# EAGLE board MicroMod_Processor_STM32WB5MMG-Panel (EAGLE 9.6.2), part 1 of 7
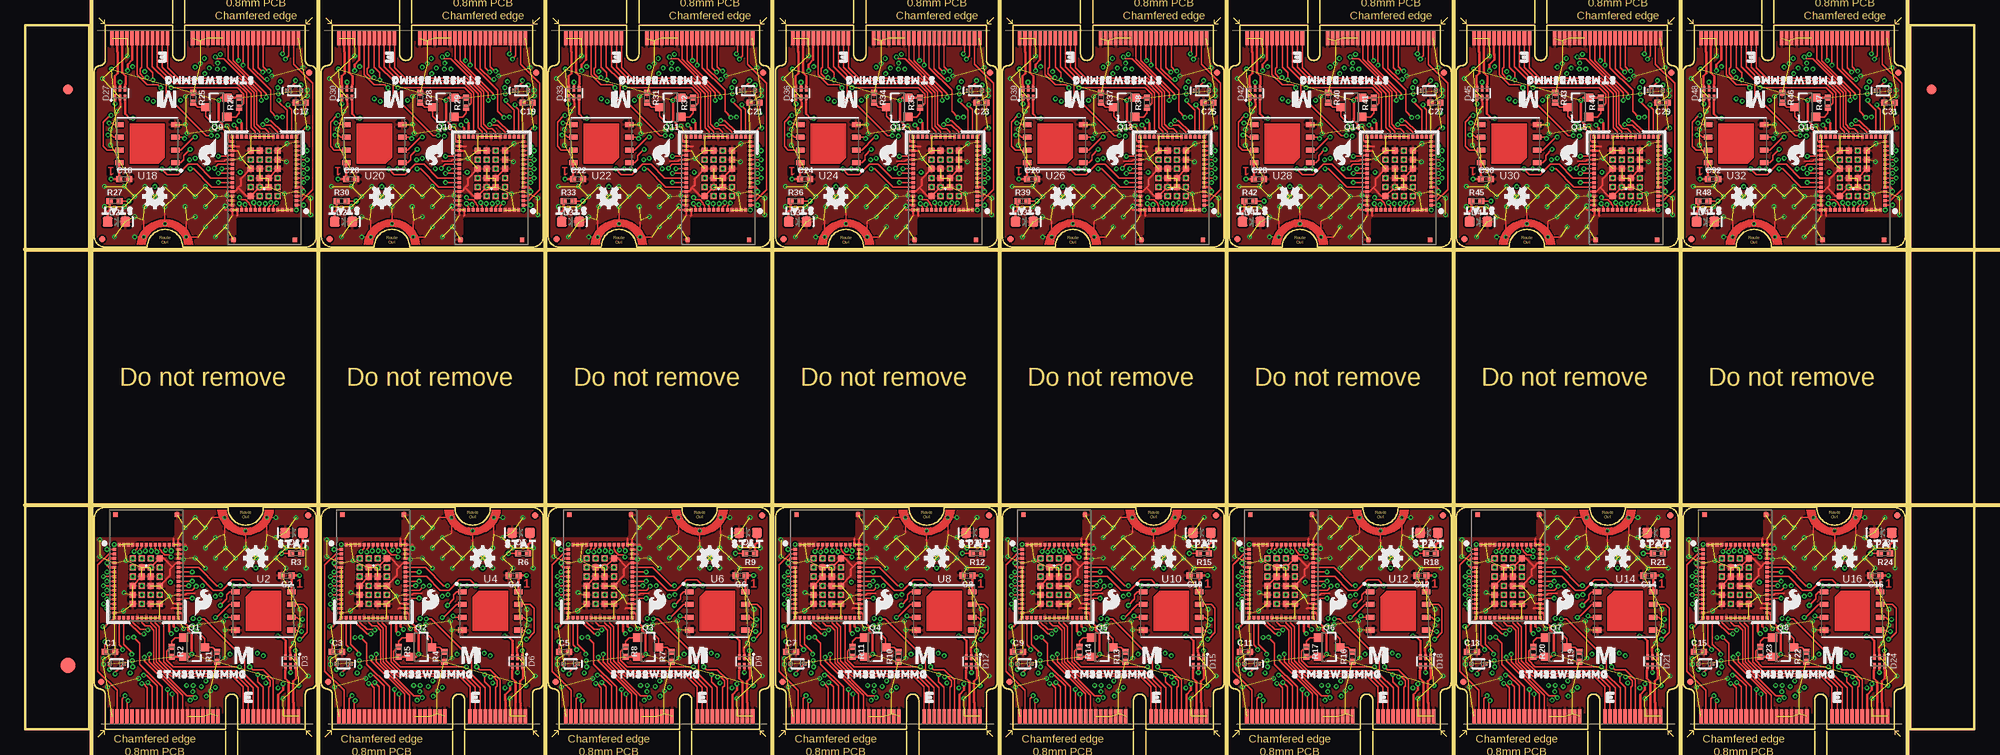
[diagram p0: board, top side]
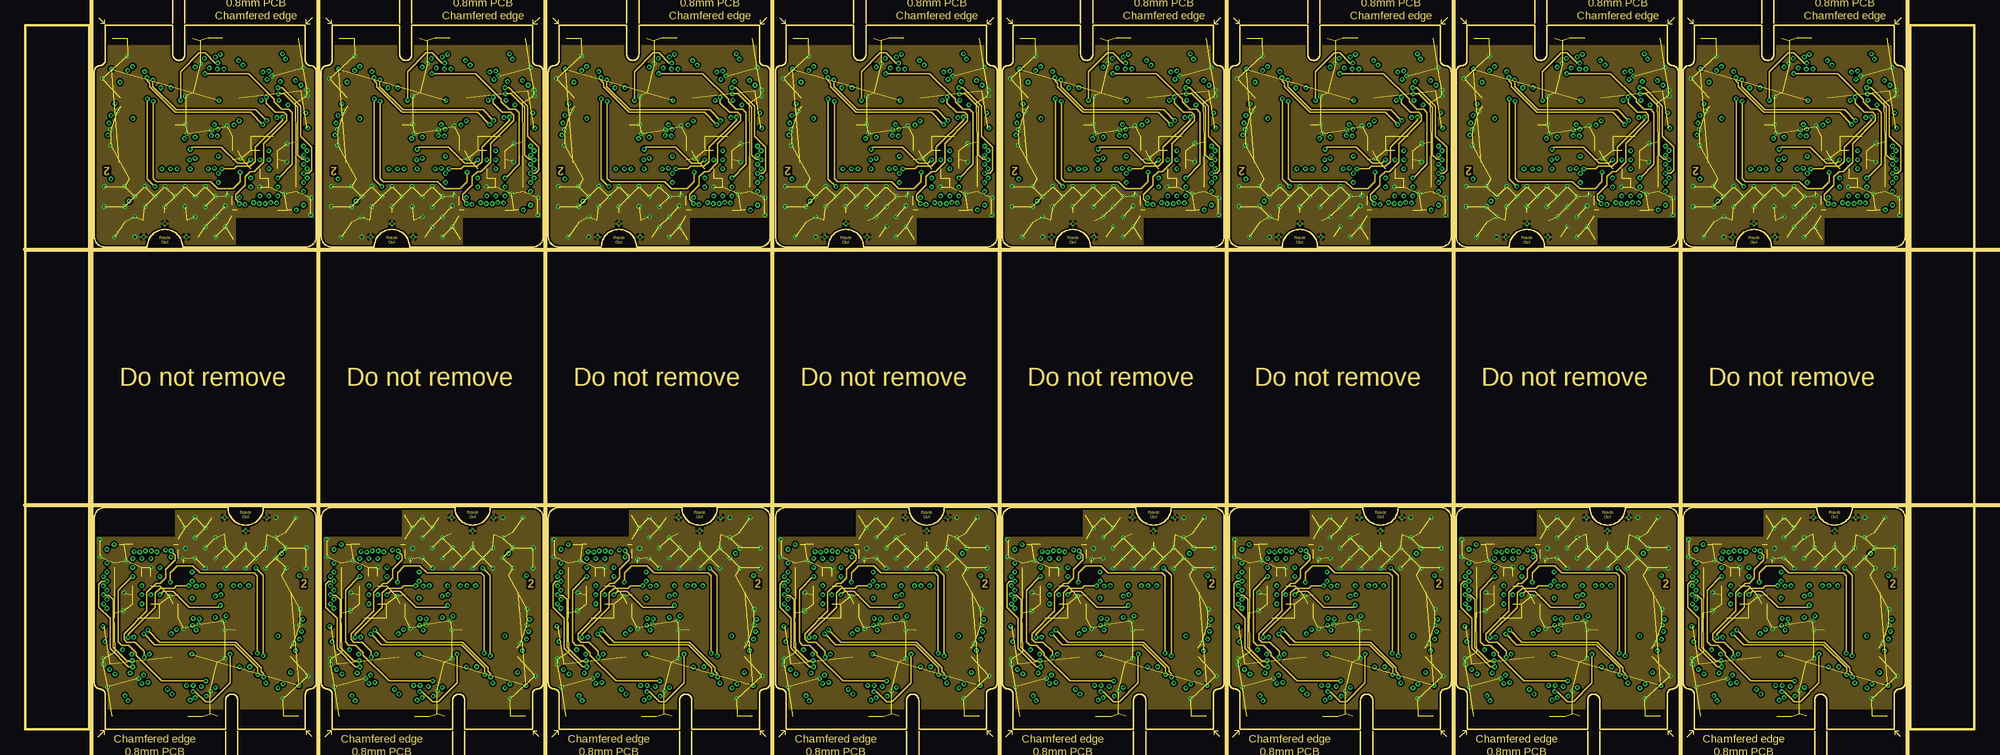
[diagram p1: board, inner layer Route2]
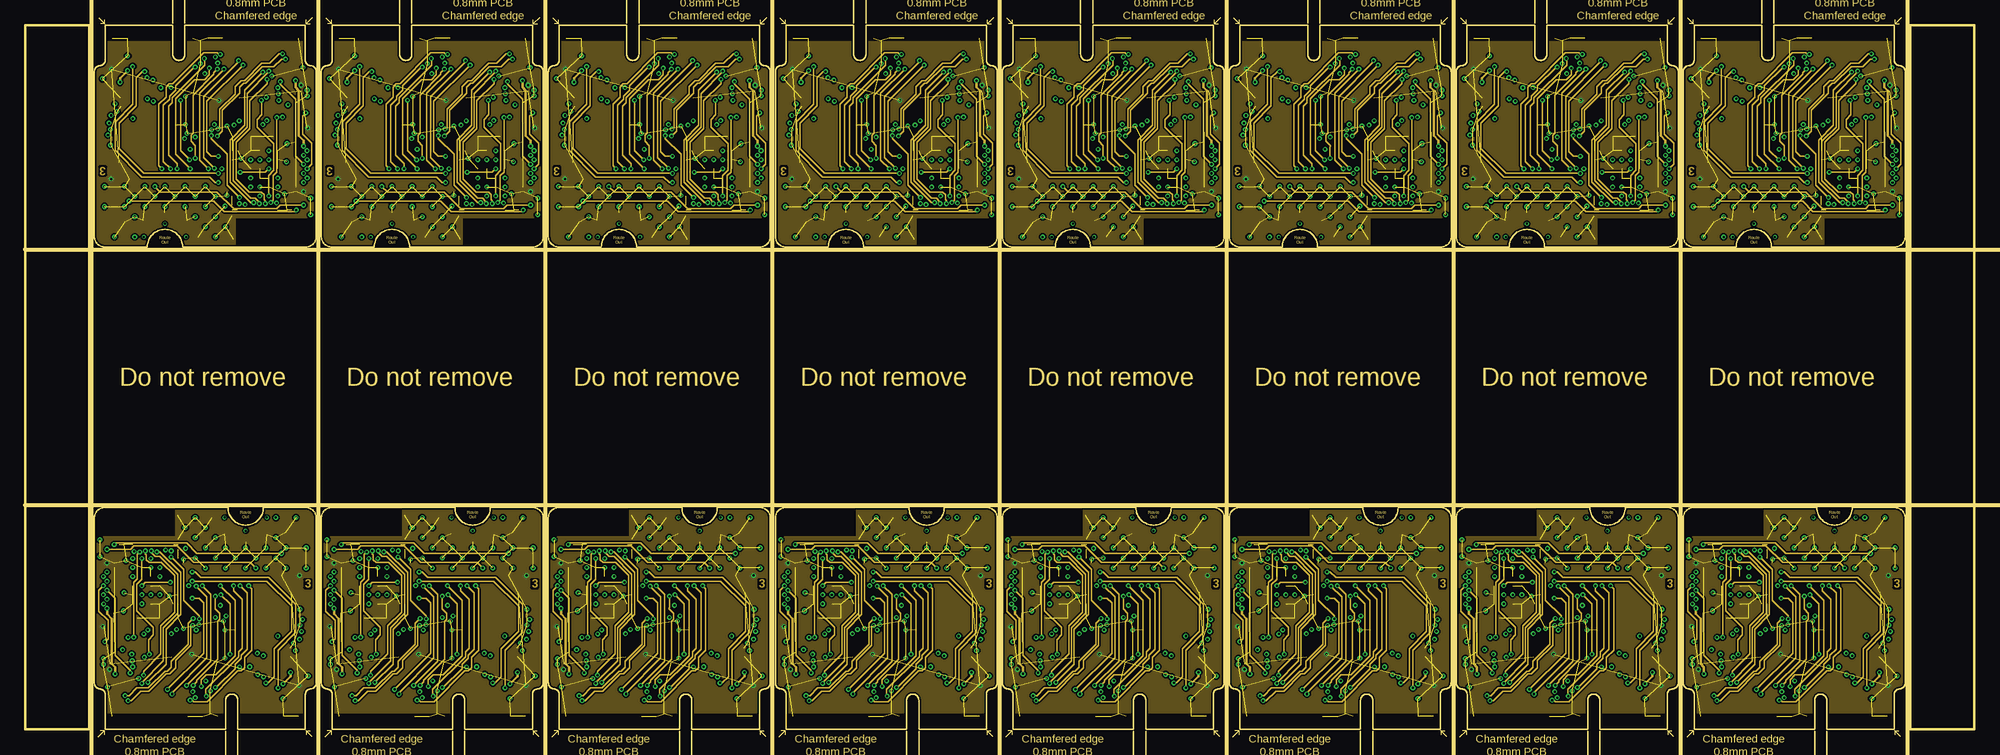
[diagram p2: board, inner layer Route15]
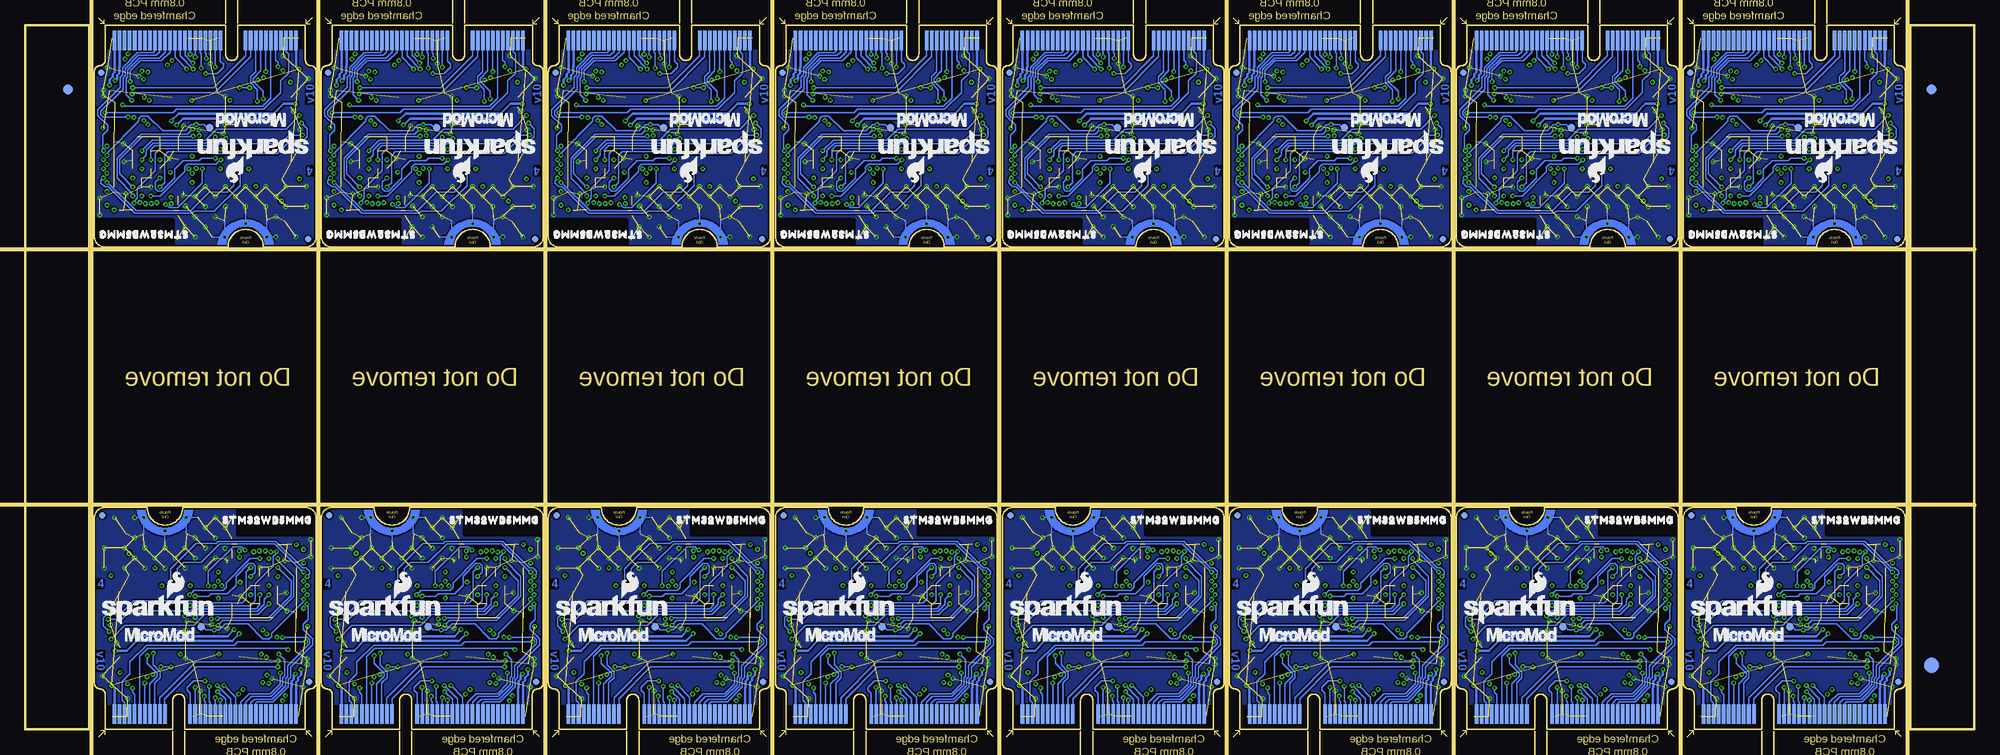
[diagram p3: board, bottom side, seen from below]

Size 193.27 x 69.85 mm. Coordinates in mm from the lower left corner, seen from the top.
Outline: 312 segments
Copper layers (1+2*15+16): Top 0.035mm / dielectric 0.2mm / Route2 0.0175mm / dielectric 0.265mm / Route15 0.0175mm / dielectric 0.2mm / Bottom 0.035mm
Design rules "MicroMod_Processor_STM32WB5MMG": minimum track width 4mil, minimum drill 0.2mm, track to track 4mil, track to pad 4mil, pad to pad 4mil, via to via 4mil, smd to smd 4mil, copper to edge 6mil, drill to drill 6mil, minimum pad ring 3mil, minimum via ring 5mil, stop-mask expansion 2.5mil, vias tented up to drill 25mil, thermal gap 10mil
Net classes: 1 USB_Diff: width 0.25 mm, clearance 0.2 mm to class 0, clearance 0.2 mm; 2 Power: width 0.25 mm
tRestrict: area 15.1,12.2 to 15.3,12.2; area 15.1,17.6 to 15.3,17.6; area 15.1,17.1 to 15.3,17.2; area 15.1,16.7 to 15.3,16.8; area 37.6,12.2 to 37.8,12.2; area 37.6,17.6 to 37.8,17.6; area 37.6,17.1 to 37.8,17.2; area 37.6,16.7 to 37.8,16.8; area 60.1,12.2 to 60.3,12.2; area 60.1,17.6 to 60.3,17.6; area 60.1,17.1 to 60.3,17.2; area 60.1,16.7 to 60.3,16.8; 52 more areas
Milling: 11 lines

## Footprints (pad centres in the part's own frame; a part is rotated, then mirrored left to right if it is on the bottom)
0402-TIGHT = smd 0.6 x 0.6: 1 -0.5,0; 2 0.5,0
SOD-523 = smd 0.4 x 0.4: A -0.7,0; C 0.7,0
LED-0603 = smd 1 x 1: A -0.877,0; C 0.877,0
SOT886 = smd 0.61 x 0.25: 1 -0.405,0.5 | smd 0.56 x 0.25: 2 -0.43,0; 3 -0.43,-0.5; 4 0.43,-0.5; 5 0.43,0; 6 0.43,0.5
FIDUCIAL-1X2 = smd 1 x 1: 1 0,0
FIDUCIAL-1.5X3 = smd 1.5 x 1.5: 1 0,0
FIDUCIAL-MICRO = smd 0.635 x 0.635: 1 0,0
M.2-CARD-E-22 = smd 0.35 x 1.45: 1 9.25,1.275; 3 8.75,1.275; 5 8.25,1.275; 7 7.75,1.275; 9 7.25,1.275; 11 6.75,1.275; 13 6.25,1.275; 15 5.75,1.275; 17 5.25,1.275; 19 4.75,1.275; 21 4.25,1.275; 23 3.75,1.275; 33 1.25,1.275; 35 0.75,1.275; 37 0.25,1.275; 39 -0.25,1.275; 41 -0.75,1.275; 43 -1.25,1.275; 45 -1.75,1.275; 47 -2.25,1.275; 49 -2.75,1.275; 51 -3.25,1.275; 53 -3.75,1.275; 55 -4.25,1.275; 57 -4.75,1.275; 59 -5.25,1.275; 61 -5.75,1.275; 63 -6.25,1.275; 65 -6.75,1.275; 67 -7.25,1.275; 69 -7.75,1.275; 71 -8.25,1.275; 73 -8.75,1.275; 75 -9.25,1.275 | smd 0.35 x 1.95 bottom: 2 9,1.525; 4 8.5,1.525; 6 8,1.525; 8 7.5,1.525; 10 7,1.525; 12 6.5,1.525; 14 6,1.525; 16 5.5,1.525; 18 5,1.525; 20 4.5,1.525; 22 4,1.525; 32 1.5,1.525; 34 1,1.525; 36 0.5,1.525; 38 0,1.525; 40 -0.5,1.525; 42 -1,1.525; 44 -1.5,1.525; 46 -2,1.525; 48 -2.5,1.525; 50 -3,1.525; 52 -3.5,1.525; 54 -4,1.525; 56 -4.5,1.525; 58 -5,1.525; 60 -5.5,1.525; 62 -6,1.525; 64 -6.5,1.525; 66 -7,1.525; 68 -7.5,1.525; 70 -8,1.525; 72 -8.5,1.525; 74 -9,1.525 | drill 0.2: GND1 1.9,21; GND2 4,19.7; GND3 6.1,21
SOT23-3 = smd 0.8 x 0.9: 1 -0.95,-1; 2 0.95,-1; 3 0,1.1
PAD.03X.03 = smd 0.762 x 0.762: 1 0,0
SIP-LGA86 = smd 0.35 x 0.35: 1 -3.175,2.075; 17 -3.175,-5.175; 31 3.175,-5.175; 47 3.175,2.075 | smd 0.35 x 0.3: 2 -3.175,1.6; 3 -3.175,1.15; 4 -3.175,0.7; 5 -3.175,0.25; 6 -3.175,-0.2; 7 -3.175,-0.65; 8 -3.175,-1.1; 9 -3.175,-1.55; 10 -3.175,-2; 11 -3.175,-2.45; 12 -3.175,-2.9; 13 -3.175,-3.35; 14 -3.175,-3.8; 15 -3.175,-4.25; 16 -3.175,-4.7; 32 3.175,-4.7; 33 3.175,-4.25; 34 3.175,-3.8; 35 3.175,-3.35; 36 3.175,-2.9; 37 3.175,-2.45; 38 3.175,-2; 39 3.175,-1.55; 40 3.175,-1.1; 41 3.175,-0.65; 42 3.175,-0.2; 43 3.175,0.25; 44 3.175,0.7; 45 3.175,1.15; 46 3.175,1.6 | smd 0.3 x 0.35: 18 -2.7,-5.175; 19 -2.25,-5.175; 20 -1.8,-5.175; 21 -1.35,-5.175; 22 -0.9,-5.175; 23 -0.45,-5.175; 24 0,-5.175; 25 0.45,-5.175; 26 0.9,-5.175; 27 1.35,-5.175; 28 1.8,-5.175; 29 2.25,-5.175; 30 2.7,-5.175; 48 2.7,2.075; 49 2.25,2.075; 50 1.8,2.075; 51 1.35,2.075; 52 0.9,2.075; 53 0.45,2.075; 54 0,2.075; 55 -0.45,2.075; 56 -0.9,2.075; 57 -1.35,2.075; 58 -1.8,2.075; 59 -2.25,2.075; 60 -2.7,2.075 | smd 0.6 x 0.6: 61 -1.35,0.7; 62 -1.35,-0.2; 63 -1.35,-1.1; 64 -1.35,-2; 65 -1.35,-2.9; 66 -1.35,-3.8; 67 -0.45,-3.8; 68 0.45,-3.8; 69 1.35,-3.8; 70 1.35,-2.9; 71 1.35,-2; 72 1.35,-1.1; 73 1.35,-0.2; 74 1.35,0.7; 75 0.45,0.7; 76 -0.45,0.7; 77 -0.45,-0.2; 78 -0.45,-1.1; 79 -0.45,-2; 80 -0.45,-2.9; 81 0.45,-2.9; 82 0.45,-2; 83 0.45,-1.1; 84 0.45,-0.2 | smd 0.43 x 0.43: 85 -3.05,5.035; 86 3.05,5.035
WSON-8-6X5 = smd 0.85 x 0.5: 1 -2.775,1.905; 2 -2.775,0.635; 3 -2.775,-0.635; 4 -2.775,-1.905; 5 2.775,-1.905; 6 2.775,-0.635; 7 2.775,0.635; 8 2.775,1.905

## Placement (x,y rotation side)
C1  0.1uF  [0402-TIGHT]  8.41,7.7 0 top
C2  0.1uF  [0402-TIGHT]  25.91,15.25 180 top
C3  0.1uF  [0402-TIGHT]  30.91,7.7 0 top
C4  0.1uF  [0402-TIGHT]  48.41,15.25 180 top
C5  0.1uF  [0402-TIGHT]  53.42,7.7 0 top
C6  0.1uF  [0402-TIGHT]  70.92,15.25 180 top
C7  0.1uF  [0402-TIGHT]  75.93,7.7 0 top
C8  0.1uF  [0402-TIGHT]  93.43,15.25 180 top
C9  0.1uF  [0402-TIGHT]  98.44,7.7 0 top
C10  0.1uF  [0402-TIGHT]  115.94,15.25 180 top
C11  0.1uF  [0402-TIGHT]  120.95,7.7 0 top
C12  0.1uF  [0402-TIGHT]  138.45,15.25 180 top
C13  0.1uF  [0402-TIGHT]  143.46,7.7 0 top
C14  0.1uF  [0402-TIGHT]  160.96,15.25 180 top
C15  0.1uF  [0402-TIGHT]  165.96,7.7 0 top
C16  0.1uF  [0402-TIGHT]  183.46,15.25 180 top
C17  0.1uF  [0402-TIGHT]  27.31,62.15 180 top
C18  0.1uF  [0402-TIGHT]  9.81,54.6 0 top
C19  0.1uF  [0402-TIGHT]  49.82,62.15 180 top
C20  0.1uF  [0402-TIGHT]  32.32,54.6 0 top
C21  0.1uF  [0402-TIGHT]  72.32,62.15 180 top
C22  0.1uF  [0402-TIGHT]  54.82,54.6 0 top
C23  0.1uF  [0402-TIGHT]  94.83,62.15 180 top
C24  0.1uF  [0402-TIGHT]  77.33,54.6 0 top
C25  0.1uF  [0402-TIGHT]  117.34,62.15 180 top
C26  0.1uF  [0402-TIGHT]  99.84,54.6 0 top
C27  0.1uF  [0402-TIGHT]  139.85,62.15 180 top
C28  0.1uF  [0402-TIGHT]  122.35,54.6 0 top
C29  0.1uF  [0402-TIGHT]  162.36,62.15 180 top
C30  0.1uF  [0402-TIGHT]  144.86,54.6 0 top
C31  0.1uF  [0402-TIGHT]  184.86,62.15 180 top
C32  0.1uF  [0402-TIGHT]  167.36,54.6 0 top
D1  120mA/40V/370mV  [SOD-523]  9.06,6.5 0 top
D2  BLUE  [LED-0603]  26.66,19.5 180 top
D3  PRTR5V0U2F  [SOT886]  26.31,6.75 270 top
D4  120mA/40V/370mV  [SOD-523]  31.56,6.5 0 top
D5  BLUE  [LED-0603]  49.16,19.5 180 top
D6  PRTR5V0U2F  [SOT886]  48.81,6.75 270 top
D7  120mA/40V/370mV  [SOD-523]  54.07,6.5 0 top
D8  BLUE  [LED-0603]  71.67,19.5 180 top
D9  PRTR5V0U2F  [SOT886]  71.32,6.75 270 top
D10  120mA/40V/370mV  [SOD-523]  76.58,6.5 0 top
D11  BLUE  [LED-0603]  94.18,19.5 180 top
D12  PRTR5V0U2F  [SOT886]  93.83,6.75 270 top
D13  120mA/40V/370mV  [SOD-523]  99.09,6.5 0 top
D14  BLUE  [LED-0603]  116.69,19.5 180 top
D15  PRTR5V0U2F  [SOT886]  116.34,6.75 270 top
D16  120mA/40V/370mV  [SOD-523]  121.6,6.5 0 top
D17  BLUE  [LED-0603]  139.2,19.5 180 top
D18  PRTR5V0U2F  [SOT886]  138.85,6.75 270 top
D19  120mA/40V/370mV  [SOD-523]  144.11,6.5 0 top
D20  BLUE  [LED-0603]  161.71,19.5 180 top
D21  PRTR5V0U2F  [SOT886]  161.36,6.75 270 top
D22  120mA/40V/370mV  [SOD-523]  166.61,6.5 0 top
D23  BLUE  [LED-0603]  184.21,19.5 180 top
D24  PRTR5V0U2F  [SOT886]  183.86,6.75 270 top
D25  120mA/40V/370mV  [SOD-523]  26.66,63.35 180 top
D26  BLUE  [LED-0603]  9.06,50.35 0 top
D27  PRTR5V0U2F  [SOT886]  9.41,63.1 90 top
D28  120mA/40V/370mV  [SOD-523]  49.17,63.35 180 top
D29  BLUE  [LED-0603]  31.57,50.35 0 top
D30  PRTR5V0U2F  [SOT886]  31.92,63.1 90 top
D31  120mA/40V/370mV  [SOD-523]  71.67,63.35 180 top
D32  BLUE  [LED-0603]  54.07,50.35 0 top
D33  PRTR5V0U2F  [SOT886]  54.42,63.1 90 top
D34  120mA/40V/370mV  [SOD-523]  94.18,63.35 180 top
D35  BLUE  [LED-0603]  76.58,50.35 0 top
D36  PRTR5V0U2F  [SOT886]  76.93,63.1 90 top
D37  120mA/40V/370mV  [SOD-523]  116.69,63.35 180 top
D38  BLUE  [LED-0603]  99.09,50.35 0 top
D39  PRTR5V0U2F  [SOT886]  99.44,63.1 90 top
D40  120mA/40V/370mV  [SOD-523]  139.2,63.35 180 top
D41  BLUE  [LED-0603]  121.6,50.35 0 top
D42  PRTR5V0U2F  [SOT886]  121.95,63.1 90 top
D43  120mA/40V/370mV  [SOD-523]  161.71,63.35 180 top
D44  BLUE  [LED-0603]  144.11,50.35 0 top
D45  PRTR5V0U2F  [SOT886]  144.46,63.1 90 top
D46  120mA/40V/370mV  [SOD-523]  184.21,63.35 180 top
D47  BLUE  [LED-0603]  166.61,50.35 0 top
D48  PRTR5V0U2F  [SOT886]  166.96,63.1 90 top
E$1  [FIDUCIAL-1X2]  4.23,63.5 0 top
E$2  [FIDUCIAL-1X2]  4.23,63.5 0 bottom
E$3  [FIDUCIAL-1X2]  189.04,63.5 0 top
E$4  [FIDUCIAL-1X2]  189.04,63.5 0 bottom
E$5  [FIDUCIAL-1.5X3]  4.23,6.35 0 top
E$6  [FIDUCIAL-1.5X3]  4.23,6.35 0 bottom
FD1  FIDUCIALUFIDUCIAL  [FIDUCIAL-MICRO]  7.56,4.7 0 top
FD2  FIDUCIALUFIDUCIAL  [FIDUCIAL-MICRO]  28.06,21.2 0 top
FD3  FIDUCIALUFIDUCIAL  [FIDUCIAL-MICRO]  7.56,4.7 0 bottom
FD4  FIDUCIALUFIDUCIAL  [FIDUCIAL-MICRO]  28.06,21.2 0 bottom
FD5  FIDUCIALUFIDUCIAL  [FIDUCIAL-MICRO]  30.06,4.7 0 top
FD6  FIDUCIALUFIDUCIAL  [FIDUCIAL-MICRO]  50.56,21.2 0 top
FD7  FIDUCIALUFIDUCIAL  [FIDUCIAL-MICRO]  30.06,4.7 0 bottom
FD8  FIDUCIALUFIDUCIAL  [FIDUCIAL-MICRO]  50.56,21.2 0 bottom
FD9  FIDUCIALUFIDUCIAL  [FIDUCIAL-MICRO]  52.57,4.7 0 top
FD10  FIDUCIALUFIDUCIAL  [FIDUCIAL-MICRO]  73.07,21.2 0 top
FD11  FIDUCIALUFIDUCIAL  [FIDUCIAL-MICRO]  52.57,4.7 0 bottom
FD12  FIDUCIALUFIDUCIAL  [FIDUCIAL-MICRO]  73.07,21.2 0 bottom
FD13  FIDUCIALUFIDUCIAL  [FIDUCIAL-MICRO]  75.08,4.7 0 top
FD14  FIDUCIALUFIDUCIAL  [FIDUCIAL-MICRO]  95.58,21.2 0 top
FD15  FIDUCIALUFIDUCIAL  [FIDUCIAL-MICRO]  75.08,4.7 0 bottom
FD16  FIDUCIALUFIDUCIAL  [FIDUCIAL-MICRO]  95.58,21.2 0 bottom
FD17  FIDUCIALUFIDUCIAL  [FIDUCIAL-MICRO]  97.59,4.7 0 top
FD18  FIDUCIALUFIDUCIAL  [FIDUCIAL-MICRO]  118.09,21.2 0 top
FD19  FIDUCIALUFIDUCIAL  [FIDUCIAL-MICRO]  97.59,4.7 0 bottom
FD20  FIDUCIALUFIDUCIAL  [FIDUCIAL-MICRO]  118.09,21.2 0 bottom
FD21  FIDUCIALUFIDUCIAL  [FIDUCIAL-MICRO]  120.1,4.7 0 top
FD22  FIDUCIALUFIDUCIAL  [FIDUCIAL-MICRO]  140.6,21.2 0 top
FD23  FIDUCIALUFIDUCIAL  [FIDUCIAL-MICRO]  120.1,4.7 0 bottom
FD24  FIDUCIALUFIDUCIAL  [FIDUCIAL-MICRO]  140.6,21.2 0 bottom
FD25  FIDUCIALUFIDUCIAL  [FIDUCIAL-MICRO]  142.61,4.7 0 top
FD26  FIDUCIALUFIDUCIAL  [FIDUCIAL-MICRO]  163.11,21.2 0 top
FD27  FIDUCIALUFIDUCIAL  [FIDUCIAL-MICRO]  142.61,4.7 0 bottom
FD28  FIDUCIALUFIDUCIAL  [FIDUCIAL-MICRO]  163.11,21.2 0 bottom
FD29  FIDUCIALUFIDUCIAL  [FIDUCIAL-MICRO]  165.11,4.7 0 top
FD30  FIDUCIALUFIDUCIAL  [FIDUCIAL-MICRO]  185.61,21.2 0 top
FD31  FIDUCIALUFIDUCIAL  [FIDUCIAL-MICRO]  165.11,4.7 0 bottom
FD32  FIDUCIALUFIDUCIAL  [FIDUCIAL-MICRO]  185.61,21.2 0 bottom
FD33  FIDUCIALUFIDUCIAL  [FIDUCIAL-MICRO]  28.16,65.15 180 top
FD34  FIDUCIALUFIDUCIAL  [FIDUCIAL-MICRO]  7.66,48.65 180 top
FD35  FIDUCIALUFIDUCIAL  [FIDUCIAL-MICRO]  28.16,65.15 180 bottom
FD36  FIDUCIALUFIDUCIAL  [FIDUCIAL-MICRO]  7.66,48.65 180 bottom
FD37  FIDUCIALUFIDUCIAL  [FIDUCIAL-MICRO]  50.67,65.15 180 top
FD38  FIDUCIALUFIDUCIAL  [FIDUCIAL-MICRO]  30.17,48.65 180 top
FD39  FIDUCIALUFIDUCIAL  [FIDUCIAL-MICRO]  50.67,65.15 180 bottom
FD40  FIDUCIALUFIDUCIAL  [FIDUCIAL-MICRO]  30.17,48.65 180 bottom
FD41  FIDUCIALUFIDUCIAL  [FIDUCIAL-MICRO]  73.17,65.15 180 top
FD42  FIDUCIALUFIDUCIAL  [FIDUCIAL-MICRO]  52.67,48.65 180 top
FD43  FIDUCIALUFIDUCIAL  [FIDUCIAL-MICRO]  73.17,65.15 180 bottom
FD44  FIDUCIALUFIDUCIAL  [FIDUCIAL-MICRO]  52.67,48.65 180 bottom
FD45  FIDUCIALUFIDUCIAL  [FIDUCIAL-MICRO]  95.68,65.15 180 top
FD46  FIDUCIALUFIDUCIAL  [FIDUCIAL-MICRO]  75.18,48.65 180 top
FD47  FIDUCIALUFIDUCIAL  [FIDUCIAL-MICRO]  95.68,65.15 180 bottom
FD48  FIDUCIALUFIDUCIAL  [FIDUCIAL-MICRO]  75.18,48.65 180 bottom
FD49  FIDUCIALUFIDUCIAL  [FIDUCIAL-MICRO]  118.19,65.15 180 top
FD50  FIDUCIALUFIDUCIAL  [FIDUCIAL-MICRO]  97.69,48.65 180 top
FD51  FIDUCIALUFIDUCIAL  [FIDUCIAL-MICRO]  118.19,65.15 180 bottom
FD52  FIDUCIALUFIDUCIAL  [FIDUCIAL-MICRO]  97.69,48.65 180 bottom
FD53  FIDUCIALUFIDUCIAL  [FIDUCIAL-MICRO]  140.7,65.15 180 top
FD54  FIDUCIALUFIDUCIAL  [FIDUCIAL-MICRO]  120.2,48.65 180 top
FD55  FIDUCIALUFIDUCIAL  [FIDUCIAL-MICRO]  140.7,65.15 180 bottom
FD56  FIDUCIALUFIDUCIAL  [FIDUCIAL-MICRO]  120.2,48.65 180 bottom
FD57  FIDUCIALUFIDUCIAL  [FIDUCIAL-MICRO]  163.21,65.15 180 top
FD58  FIDUCIALUFIDUCIAL  [FIDUCIAL-MICRO]  142.71,48.65 180 top
FD59  FIDUCIALUFIDUCIAL  [FIDUCIAL-MICRO]  163.21,65.15 180 bottom
FD60  FIDUCIALUFIDUCIAL  [FIDUCIAL-MICRO]  142.71,48.65 180 bottom
FD61  FIDUCIALUFIDUCIAL  [FIDUCIAL-MICRO]  185.71,65.15 180 top
FD62  FIDUCIALUFIDUCIAL  [FIDUCIAL-MICRO]  165.21,48.65 180 top
FD63  FIDUCIALUFIDUCIAL  [FIDUCIAL-MICRO]  185.71,65.15 180 bottom
FD64  FIDUCIALUFIDUCIAL  [FIDUCIAL-MICRO]  165.21,48.65 180 bottom
J1  MICROMOD-2222  [M.2-CARD-E-22]  17.86,0 0 top
J2  MICROMOD-2222  [M.2-CARD-E-22]  40.36,0 0 top
J3  MICROMOD-2222  [M.2-CARD-E-22]  62.87,0 0 top
J4  MICROMOD-2222  [M.2-CARD-E-22]  85.38,0 0 top
J5  MICROMOD-2222  [M.2-CARD-E-22]  107.89,0 0 top
J6  MICROMOD-2222  [M.2-CARD-E-22]  130.4,0 0 top
J7  MICROMOD-2222  [M.2-CARD-E-22]  152.91,0 0 top
J8  MICROMOD-2222  [M.2-CARD-E-22]  175.41,0 0 top
J9  MICROMOD-2222  [M.2-CARD-E-22]  17.86,69.85 180 top
J10  MICROMOD-2222  [M.2-CARD-E-22]  40.37,69.85 180 top
J11  MICROMOD-2222  [M.2-CARD-E-22]  62.87,69.85 180 top
J12  MICROMOD-2222  [M.2-CARD-E-22]  85.38,69.85 180 top
J13  MICROMOD-2222  [M.2-CARD-E-22]  107.89,69.85 180 top
J14  MICROMOD-2222  [M.2-CARD-E-22]  130.4,69.85 180 top
J15  MICROMOD-2222  [M.2-CARD-E-22]  152.91,69.85 180 top
J16  MICROMOD-2222  [M.2-CARD-E-22]  175.41,69.85 180 top
LOGO1  FOUR_LAYER_WARNING  [FOUR_LAYER_WARNING]  35.26,30.35 0 top
LOGO2  OSHW-LOGOMINI  [OSHW-LOGO-MINI]  22.86,17 0 top
LOGO3  SFE_LOGO_NAME_FLAME.1_INCH  [SFE_LOGO_NAME_FLAME_.1]  22.51,11.9 0 bottom
LOGO4  FOUR_LAYER_WARNING  [FOUR_LAYER_WARNING]  57.76,30.35 0 top
LOGO5  OSHW-LOGOMINI  [OSHW-LOGO-MINI]  45.36,17 0 top
LOGO6  SFE_LOGO_NAME_FLAME.1_INCH  [SFE_LOGO_NAME_FLAME_.1]  45.01,11.9 0 bottom
LOGO7  FOUR_LAYER_WARNING  [FOUR_LAYER_WARNING]  80.27,30.35 0 top
LOGO8  OSHW-LOGOMINI  [OSHW-LOGO-MINI]  67.87,17 0 top
LOGO9  SFE_LOGO_NAME_FLAME.1_INCH  [SFE_LOGO_NAME_FLAME_.1]  67.52,11.9 0 bottom
LOGO10  FOUR_LAYER_WARNING  [FOUR_LAYER_WARNING]  102.78,30.35 0 top
LOGO11  OSHW-LOGOMINI  [OSHW-LOGO-MINI]  90.38,17 0 top
LOGO12  SFE_LOGO_NAME_FLAME.1_INCH  [SFE_LOGO_NAME_FLAME_.1]  90.03,11.9 0 bottom
LOGO13  FOUR_LAYER_WARNING  [FOUR_LAYER_WARNING]  125.29,30.35 0 top
LOGO14  OSHW-LOGOMINI  [OSHW-LOGO-MINI]  112.89,17 0 top
LOGO15  SFE_LOGO_NAME_FLAME.1_INCH  [SFE_LOGO_NAME_FLAME_.1]  112.54,11.9 0 bottom
LOGO16  FOUR_LAYER_WARNING  [FOUR_LAYER_WARNING]  147.8,30.35 0 top
LOGO17  OSHW-LOGOMINI  [OSHW-LOGO-MINI]  135.4,17 0 top
LOGO18  SFE_LOGO_NAME_FLAME.1_INCH  [SFE_LOGO_NAME_FLAME_.1]  135.05,11.9 0 bottom
LOGO19  FOUR_LAYER_WARNING  [FOUR_LAYER_WARNING]  170.31,30.35 0 top
LOGO20  OSHW-LOGOMINI  [OSHW-LOGO-MINI]  157.91,17 0 top
LOGO21  SFE_LOGO_NAME_FLAME.1_INCH  [SFE_LOGO_NAME_FLAME_.1]  157.56,11.9 0 bottom
LOGO22  FOUR_LAYER_WARNING  [FOUR_LAYER_WARNING]  192.81,30.35 0 top
LOGO23  OSHW-LOGOMINI  [OSHW-LOGO-MINI]  180.41,17 0 top
LOGO24  SFE_LOGO_NAME_FLAME.1_INCH  [SFE_LOGO_NAME_FLAME_.1]  180.06,11.9 0 bottom
LOGO25  FOUR_LAYER_WARNING  [FOUR_LAYER_WARNING]  0.46,39.5 180 top
LOGO26  OSHW-LOGOMINI  [OSHW-LOGO-MINI]  12.86,52.85 180 top
LOGO27  SFE_LOGO_NAME_FLAME.1_INCH  [SFE_LOGO_NAME_FLAME_.1]  13.21,57.95 180 bottom
LOGO28  FOUR_LAYER_WARNING  [FOUR_LAYER_WARNING]  22.97,39.5 180 top
LOGO29  OSHW-LOGOMINI  [OSHW-LOGO-MINI]  35.37,52.85 180 top
LOGO30  SFE_LOGO_NAME_FLAME.1_INCH  [SFE_LOGO_NAME_FLAME_.1]  35.72,57.95 180 bottom
LOGO31  FOUR_LAYER_WARNING  [FOUR_LAYER_WARNING]  45.47,39.5 180 top
LOGO32  OSHW-LOGOMINI  [OSHW-LOGO-MINI]  57.87,52.85 180 top
LOGO33  SFE_LOGO_NAME_FLAME.1_INCH  [SFE_LOGO_NAME_FLAME_.1]  58.22,57.95 180 bottom
LOGO34  FOUR_LAYER_WARNING  [FOUR_LAYER_WARNING]  67.98,39.5 180 top
LOGO35  OSHW-LOGOMINI  [OSHW-LOGO-MINI]  80.38,52.85 180 top
LOGO36  SFE_LOGO_NAME_FLAME.1_INCH  [SFE_LOGO_NAME_FLAME_.1]  80.73,57.95 180 bottom
LOGO37  FOUR_LAYER_WARNING  [FOUR_LAYER_WARNING]  90.49,39.5 180 top
LOGO38  OSHW-LOGOMINI  [OSHW-LOGO-MINI]  102.89,52.85 180 top
LOGO39  SFE_LOGO_NAME_FLAME.1_INCH  [SFE_LOGO_NAME_FLAME_.1]  103.24,57.95 180 bottom
LOGO40  FOUR_LAYER_WARNING  [FOUR_LAYER_WARNING]  113,39.5 180 top
LOGO41  OSHW-LOGOMINI  [OSHW-LOGO-MINI]  125.4,52.85 180 top
LOGO42  SFE_LOGO_NAME_FLAME.1_INCH  [SFE_LOGO_NAME_FLAME_.1]  125.75,57.95 180 bottom
LOGO43  FOUR_LAYER_WARNING  [FOUR_LAYER_WARNING]  135.51,39.5 180 top
LOGO44  OSHW-LOGOMINI  [OSHW-LOGO-MINI]  147.91,52.85 180 top
LOGO45  SFE_LOGO_NAME_FLAME.1_INCH  [SFE_LOGO_NAME_FLAME_.1]  148.26,57.95 180 bottom
LOGO46  FOUR_LAYER_WARNING  [FOUR_LAYER_WARNING]  158.01,39.5 180 top
LOGO47  OSHW-LOGOMINI  [OSHW-LOGO-MINI]  170.41,52.85 180 top
LOGO48  SFE_LOGO_NAME_FLAME.1_INCH  [SFE_LOGO_NAME_FLAME_.1]  170.76,57.95 180 bottom
Q1  20V/4.2A/52mΩ/1.4W  [SOT23-3]  16.71,8.15 270 top
Q2  20V/4.2A/52mΩ/1.4W  [SOT23-3]  39.21,8.15 270 top
Q3  20V/4.2A/52mΩ/1.4W  [SOT23-3]  61.72,8.15 270 top
Q4  20V/4.2A/52mΩ/1.4W  [SOT23-3]  84.23,8.15 270 top
Q5  20V/4.2A/52mΩ/1.4W  [SOT23-3]  106.74,8.15 270 top
Q6  20V/4.2A/52mΩ/1.4W  [SOT23-3]  129.25,8.15 270 top
Q7  20V/4.2A/52mΩ/1.4W  [SOT23-3]  151.76,8.15 270 top
Q8  20V/4.2A/52mΩ/1.4W  [SOT23-3]  174.26,8.15 270 top
Q9  20V/4.2A/52mΩ/1.4W  [SOT23-3]  19.01,61.7 90 top
Q10  20V/4.2A/52mΩ/1.4W  [SOT23-3]  41.52,61.7 90 top
Q11  20V/4.2A/52mΩ/1.4W  [SOT23-3]  64.02,61.7 90 top
Q12  20V/4.2A/52mΩ/1.4W  [SOT23-3]  86.53,61.7 90 top
Q13  20V/4.2A/52mΩ/1.4W  [SOT23-3]  109.04,61.7 90 top
Q14  20V/4.2A/52mΩ/1.4W  [SOT23-3]  131.55,61.7 90 top
Q15  20V/4.2A/52mΩ/1.4W  [SOT23-3]  154.06,61.7 90 top
Q16  20V/4.2A/52mΩ/1.4W  [SOT23-3]  176.56,61.7 90 top
R1  100k  [0402-TIGHT]  19.06,7.2 90 top
R2  100k  [0402-TIGHT]  14.51,7.7 270 top
R3  2.2k  [0402-TIGHT]  26.86,17.45 180 top
R4  100k  [0402-TIGHT]  41.56,7.2 90 top
R5  100k  [0402-TIGHT]  37.01,7.7 270 top
R6  2.2k  [0402-TIGHT]  49.36,17.45 180 top
R7  100k  [0402-TIGHT]  64.07,7.2 90 top
R8  100k  [0402-TIGHT]  59.52,7.7 270 top
R9  2.2k  [0402-TIGHT]  71.87,17.45 180 top
R10  100k  [0402-TIGHT]  86.58,7.2 90 top
R11  100k  [0402-TIGHT]  82.03,7.7 270 top
R12  2.2k  [0402-TIGHT]  94.38,17.45 180 top
R13  100k  [0402-TIGHT]  109.09,7.2 90 top
R14  100k  [0402-TIGHT]  104.54,7.7 270 top
R15  2.2k  [0402-TIGHT]  116.89,17.45 180 top
R16  100k  [0402-TIGHT]  131.6,7.2 90 top
R17  100k  [0402-TIGHT]  127.05,7.7 270 top
R18  2.2k  [0402-TIGHT]  139.4,17.45 180 top
R19  100k  [0402-TIGHT]  154.11,7.2 90 top
R20  100k  [0402-TIGHT]  149.56,7.7 270 top
R21  2.2k  [0402-TIGHT]  161.91,17.45 180 top
R22  100k  [0402-TIGHT]  176.61,7.2 90 top
R23  100k  [0402-TIGHT]  172.06,7.7 270 top
R24  2.2k  [0402-TIGHT]  184.41,17.45 180 top
R25  100k  [0402-TIGHT]  16.66,62.65 270 top
R26  100k  [0402-TIGHT]  21.21,62.15 90 top
R27  2.2k  [0402-TIGHT]  8.86,52.4 0 top
R28  100k  [0402-TIGHT]  39.17,62.65 270 top
R29  100k  [0402-TIGHT]  43.72,62.15 90 top
R30  2.2k  [0402-TIGHT]  31.37,52.4 0 top
R31  100k  [0402-TIGHT]  61.67,62.65 270 top
R32  100k  [0402-TIGHT]  66.22,62.15 90 top
R33  2.2k  [0402-TIGHT]  53.87,52.4 0 top
R34  100k  [0402-TIGHT]  84.18,62.65 270 top
R35  100k  [0402-TIGHT]  88.73,62.15 90 top
R36  2.2k  [0402-TIGHT]  76.38,52.4 0 top
R37  100k  [0402-TIGHT]  106.69,62.65 270 top
R38  100k  [0402-TIGHT]  111.24,62.15 90 top
R39  2.2k  [0402-TIGHT]  98.89,52.4 0 top
R40  100k  [0402-TIGHT]  129.2,62.65 270 top
R41  100k  [0402-TIGHT]  133.75,62.15 90 top
R42  2.2k  [0402-TIGHT]  121.4,52.4 0 top
R43  100k  [0402-TIGHT]  151.71,62.65 270 top
R44  100k  [0402-TIGHT]  156.26,62.15 90 top
R45  2.2k  [0402-TIGHT]  143.91,52.4 0 top
R46  100k  [0402-TIGHT]  174.21,62.65 270 top
R47  100k  [0402-TIGHT]  178.76,62.15 90 top
R48  2.2k  [0402-TIGHT]  166.41,52.4 0 top
TP1  TEST-POINT3  [PAD.03X.03]  18.29,10.16 0 bottom
TP2  TEST-POINT3  [PAD.03X.03]  40.79,10.16 0 bottom
TP3  TEST-POINT3  [PAD.03X.03]  63.3,10.16 0 bottom
TP4  TEST-POINT3  [PAD.03X.03]  85.81,10.16 0 bottom
TP5  TEST-POINT3  [PAD.03X.03]  108.32,10.16 0 bottom
TP6  TEST-POINT3  [PAD.03X.03]  130.83,10.16 0 bottom
TP7  TEST-POINT3  [PAD.03X.03]  153.34,10.16 0 bottom
TP8  TEST-POINT3  [PAD.03X.03]  175.84,10.16 0 bottom
TP9  TEST-POINT3  [PAD.03X.03]  17.43,59.69 180 bottom
TP10  TEST-POINT3  [PAD.03X.03]  39.94,59.69 180 bottom
TP11  TEST-POINT3  [PAD.03X.03]  62.44,59.69 180 bottom
TP12  TEST-POINT3  [PAD.03X.03]  84.95,59.69 180 bottom
TP13  TEST-POINT3  [PAD.03X.03]  107.46,59.69 180 bottom
TP14  TEST-POINT3  [PAD.03X.03]  129.97,59.69 180 bottom
TP15  TEST-POINT3  [PAD.03X.03]  152.48,59.69 180 bottom
TP16  TEST-POINT3  [PAD.03X.03]  174.98,59.69 180 bottom
U1  STM32WB5MMG  [SIP-LGA86]  12.01,16.25 0 top
U2  W25QXX128MBIT-6X5  [WSON-8-6X5]  23.61,11.75 0 top
U3  STM32WB5MMG  [SIP-LGA86]  34.51,16.25 0 top
U4  W25QXX128MBIT-6X5  [WSON-8-6X5]  46.11,11.75 0 top
U5  STM32WB5MMG  [SIP-LGA86]  57.02,16.25 0 top
U6  W25QXX128MBIT-6X5  [WSON-8-6X5]  68.62,11.75 0 top
U7  STM32WB5MMG  [SIP-LGA86]  79.53,16.25 0 top
U8  W25QXX128MBIT-6X5  [WSON-8-6X5]  91.13,11.75 0 top
U9  STM32WB5MMG  [SIP-LGA86]  102.04,16.25 0 top
U10  W25QXX128MBIT-6X5  [WSON-8-6X5]  113.64,11.75 0 top
U11  STM32WB5MMG  [SIP-LGA86]  124.55,16.25 0 top
U12  W25QXX128MBIT-6X5  [WSON-8-6X5]  136.15,11.75 0 top
U13  STM32WB5MMG  [SIP-LGA86]  147.06,16.25 0 top
U14  W25QXX128MBIT-6X5  [WSON-8-6X5]  158.66,11.75 0 top
U15  STM32WB5MMG  [SIP-LGA86]  169.56,16.25 0 top
U16  W25QXX128MBIT-6X5  [WSON-8-6X5]  181.16,11.75 0 top
U17  STM32WB5MMG  [SIP-LGA86]  23.71,53.6 180 top
U18  W25QXX128MBIT-6X5  [WSON-8-6X5]  12.11,58.1 180 top
U19  STM32WB5MMG  [SIP-LGA86]  46.22,53.6 180 top
U20  W25QXX128MBIT-6X5  [WSON-8-6X5]  34.62,58.1 180 top
U21  STM32WB5MMG  [SIP-LGA86]  68.72,53.6 180 top
U22  W25QXX128MBIT-6X5  [WSON-8-6X5]  57.12,58.1 180 top
U23  STM32WB5MMG  [SIP-LGA86]  91.23,53.6 180 top
U24  W25QXX128MBIT-6X5  [WSON-8-6X5]  79.63,58.1 180 top
U25  STM32WB5MMG  [SIP-LGA86]  113.74,53.6 180 top
U26  W25QXX128MBIT-6X5  [WSON-8-6X5]  102.14,58.1 180 top
U27  STM32WB5MMG  [SIP-LGA86]  136.25,53.6 180 top
U28  W25QXX128MBIT-6X5  [WSON-8-6X5]  124.65,58.1 180 top
U29  STM32WB5MMG  [SIP-LGA86]  158.76,53.6 180 top
U30  W25QXX128MBIT-6X5  [WSON-8-6X5]  147.16,58.1 180 top
U31  STM32WB5MMG  [SIP-LGA86]  181.26,53.6 180 top
U32  W25QXX128MBIT-6X5  [WSON-8-6X5]  169.66,58.1 180 top
U$1  [MICROMOD_MI_LOGO_.35]  21.66,7.35 0 top
U$2  [MICROMOD_LOGO_.3]  22.41,9.35 0 bottom
U$3  [SFE_LOGO_FLAME_.1]  17.66,12.6 0 top
U$4  [STM32WB5MMG0]  17.51,5.45 0 top
U$5  [STM32WB5MMG0]  11.71,20.75 0 bottom
U$6  [SFE_LOGO_FLAME_STOP_.1]  26.11,19.8 0 bottom
U$7  [STAT0]  26.66,18.4 0 top
U$8  [MICROMOD_MI_LOGO_.35]  44.16,7.35 0 top
U$9  [MICROMOD_LOGO_.3]  44.91,9.35 0 bottom
U$10  [SFE_LOGO_FLAME_.1]  40.16,12.6 0 top
U$11  [STM32WB5MMG0]  40.01,5.45 0 top
U$12  [STM32WB5MMG0]  34.21,20.75 0 bottom
U$13  [SFE_LOGO_FLAME_STOP_.1]  48.61,19.8 0 bottom
U$14  [STAT0]  49.16,18.4 0 top
U$15  [MICROMOD_MI_LOGO_.35]  66.67,7.35 0 top
U$16  [MICROMOD_LOGO_.3]  67.42,9.35 0 bottom
U$17  [SFE_LOGO_FLAME_.1]  62.67,12.6 0 top
U$18  [STM32WB5MMG0]  62.52,5.45 0 top
U$19  [STM32WB5MMG0]  56.72,20.75 0 bottom
U$20  [SFE_LOGO_FLAME_STOP_.1]  71.12,19.8 0 bottom
U$21  [STAT0]  71.67,18.4 0 top
U$22  [MICROMOD_MI_LOGO_.35]  89.18,7.35 0 top
U$23  [MICROMOD_LOGO_.3]  89.93,9.35 0 bottom
U$24  [SFE_LOGO_FLAME_.1]  85.18,12.6 0 top
U$25  [STM32WB5MMG0]  85.03,5.45 0 top
U$26  [STM32WB5MMG0]  79.23,20.75 0 bottom
U$27  [SFE_LOGO_FLAME_STOP_.1]  93.63,19.8 0 bottom
U$28  [STAT0]  94.18,18.4 0 top
U$29  [MICROMOD_MI_LOGO_.35]  111.69,7.35 0 top
U$30  [MICROMOD_LOGO_.3]  112.44,9.35 0 bottom
U$31  [SFE_LOGO_FLAME_.1]  107.69,12.6 0 top
U$32  [STM32WB5MMG0]  107.54,5.45 0 top
U$33  [STM32WB5MMG0]  101.74,20.75 0 bottom
U$34  [SFE_LOGO_FLAME_STOP_.1]  116.14,19.8 0 bottom
U$35  [STAT0]  116.69,18.4 0 top
U$36  [MICROMOD_MI_LOGO_.35]  134.2,7.35 0 top
U$37  [MICROMOD_LOGO_.3]  134.95,9.35 0 bottom
U$38  [SFE_LOGO_FLAME_.1]  130.2,12.6 0 top
U$39  [STM32WB5MMG0]  130.05,5.45 0 top
U$40  [STM32WB5MMG0]  124.25,20.75 0 bottom
U$41  [SFE_LOGO_FLAME_STOP_.1]  138.65,19.8 0 bottom
U$42  [STAT0]  139.2,18.4 0 top
U$43  [MICROMOD_MI_LOGO_.35]  156.71,7.35 0 top
U$44  [MICROMOD_LOGO_.3]  157.46,9.35 0 bottom
U$45  [SFE_LOGO_FLAME_.1]  152.71,12.6 0 top
U$46  [STM32WB5MMG0]  152.56,5.45 0 top
U$47  [STM32WB5MMG0]  146.76,20.75 0 bottom
U$48  [SFE_LOGO_FLAME_STOP_.1]  161.16,19.8 0 bottom
U$49  [STAT0]  161.71,18.4 0 top
U$50  [MICROMOD_MI_LOGO_.35]  179.21,7.35 0 top
U$51  [MICROMOD_LOGO_.3]  179.96,9.35 0 bottom
U$52  [SFE_LOGO_FLAME_.1]  175.21,12.6 0 top
U$53  [STM32WB5MMG0]  175.06,5.45 0 top
U$54  [STM32WB5MMG0]  169.26,20.75 0 bottom
U$55  [SFE_LOGO_FLAME_STOP_.1]  183.66,19.8 0 bottom
U$56  [STAT0]  184.21,18.4 0 top
U$57  [MICROMOD_MI_LOGO_.35]  14.06,62.5 180 top
U$58  [MICROMOD_LOGO_.3]  13.31,60.5 180 bottom
U$59  [SFE_LOGO_FLAME_.1]  18.06,57.25 180 top
U$60  [STM32WB5MMG0]  18.21,64.4 180 top
U$61  [STM32WB5MMG0]  24.01,49.1 180 bottom
U$62  [SFE_LOGO_FLAME_STOP_.1]  9.61,50.05 180 bottom
U$63  [STAT0]  9.06,51.45 180 top
U$64  [MICROMOD_MI_LOGO_.35]  36.57,62.5 180 top
U$65  [MICROMOD_LOGO_.3]  35.82,60.5 180 bottom
U$66  [SFE_LOGO_FLAME_.1]  40.57,57.25 180 top
U$67  [STM32WB5MMG0]  40.72,64.4 180 top
U$68  [STM32WB5MMG0]  46.52,49.1 180 bottom
U$69  [SFE_LOGO_FLAME_STOP_.1]  32.12,50.05 180 bottom
U$70  [STAT0]  31.57,51.45 180 top
U$71  [MICROMOD_MI_LOGO_.35]  59.07,62.5 180 top
U$72  [MICROMOD_LOGO_.3]  58.32,60.5 180 bottom
U$73  [SFE_LOGO_FLAME_.1]  63.07,57.25 180 top
U$74  [STM32WB5MMG0]  63.22,64.4 180 top
U$75  [STM32WB5MMG0]  69.02,49.1 180 bottom
U$76  [SFE_LOGO_FLAME_STOP_.1]  54.62,50.05 180 bottom
U$77  [STAT0]  54.07,51.45 180 top
U$78  [MICROMOD_MI_LOGO_.35]  81.58,62.5 180 top
U$79  [MICROMOD_LOGO_.3]  80.83,60.5 180 bottom
U$80  [SFE_LOGO_FLAME_.1]  85.58,57.25 180 top
U$81  [STM32WB5MMG0]  85.73,64.4 180 top
U$82  [STM32WB5MMG0]  91.53,49.1 180 bottom
U$83  [SFE_LOGO_FLAME_STOP_.1]  77.13,50.05 180 bottom
U$84  [STAT0]  76.58,51.45 180 top
U$85  [MICROMOD_MI_LOGO_.35]  104.09,62.5 180 top
U$86  [MICROMOD_LOGO_.3]  103.34,60.5 180 bottom
U$87  [SFE_LOGO_FLAME_.1]  108.09,57.25 180 top
U$88  [STM32WB5MMG0]  108.24,64.4 180 top
U$89  [STM32WB5MMG0]  114.04,49.1 180 bottom
U$90  [SFE_LOGO_FLAME_STOP_.1]  99.64,50.05 180 bottom
U$91  [STAT0]  99.09,51.45 180 top
U$92  [MICROMOD_MI_LOGO_.35]  126.6,62.5 180 top
U$93  [MICROMOD_LOGO_.3]  125.85,60.5 180 bottom
U$94  [SFE_LOGO_FLAME_.1]  130.6,57.25 180 top
U$95  [STM32WB5MMG0]  130.75,64.4 180 top
U$96  [STM32WB5MMG0]  136.55,49.1 180 bottom
U$97  [SFE_LOGO_FLAME_STOP_.1]  122.15,50.05 180 bottom
U$98  [STAT0]  121.6,51.45 180 top
U$99  [MICROMOD_MI_LOGO_.35]  149.11,62.5 180 top
U$100  [MICROMOD_LOGO_.3]  148.36,60.5 180 bottom
U$101  [SFE_LOGO_FLAME_.1]  153.11,57.25 180 top
U$102  [STM32WB5MMG0]  153.26,64.4 180 top
U$103  [STM32WB5MMG0]  159.06,49.1 180 bottom
U$104  [SFE_LOGO_FLAME_STOP_.1]  144.66,50.05 180 bottom
U$105  [STAT0]  144.11,51.45 180 top
U$106  [MICROMOD_MI_LOGO_.35]  171.61,62.5 180 top
U$107  [MICROMOD_LOGO_.3]  170.86,60.5 180 bottom
U$108  [SFE_LOGO_FLAME_.1]  175.61,57.25 180 top
U$109  [STM32WB5MMG0]  175.76,64.4 180 top
U$110  [STM32WB5MMG0]  181.56,49.1 180 bottom
U$111  [SFE_LOGO_FLAME_STOP_.1]  167.16,50.05 180 bottom
U$112  [STAT0]  166.61,51.45 180 top

## Library data of the parts
C1-C32 = SparkFun-Capacitors; PROD_ID: CAP-15083
D1 D4 D7 D10 D13 D16 D19 D22 D25 D28 D31 D34 D37 D40 D43 D46 = SparkFun-DiscreteSemi; PROD_ID: DIO-11018
D2 D5 D8 D11 D14 D17 D20 D23 D26 D29 D32 D35 D38 D41 D44 D47 = SparkFun-LED; PROD_ID: DIO-08575
D3 D6 D9 D12 D15 D18 D21 D24 D27 D30 D33 D36 D39 D42 D45 D48 = SparkFun-IC-Power; PROD_ID: DIO-14084
E$1-E$4 FD1-FD64 LOGO1-LOGO48 U$3 U$6 U$10 U$13 U$17 U$20 U$24 U$27 U$31 U$34 U$38 U$41 U$45 U$48 U$52 U$55 U$59 U$62 U$66 U$69 U$73 U$76 U$80 U$83 U$87 U$90 U$94 U$97 U$101 U$104 U$108 U$111 = SparkFun-Aesthetics
E$5 E$6 = SparkFun-Retired
J1-J16 U$1 U$2 U$8 U$9 U$15 U$16 U$22 U$23 U$29 U$30 U$36 U$37 U$43 U$44 U$50 U$51 U$57 U$58 U$64 U$65 U$71 U$72 U$78 U$79 U$85 U$86 U$92 U$93 U$99 U$100 U$106 U$107 = SparkFun-MicroMod
Q1-Q16 = SparkFun-DiscreteSemi; PROD_ID: TRANS-14388
R1 R2 R4 R5 R7 R8 R10 R11 R13 R14 R16 R17 R19 R20 R22 R23 R25 R26 R28 R29 R31 R32 R34 R35 R37 R38 R40 R41 R43 R44 R46 R47 = SparkFun-Resistors; PROD_ID: RES-13495
R3 R6 R9 R12 R15 R18 R21 R24 R27 R30 R33 R36 R39 R42 R45 R48 = SparkFun-Resistors; PROD_ID: RES-14341
TP1-TP16 = SparkFun-Connectors
U1 U3 U5 U7 U9 U11 U13 U15 U17 U19 U21 U23 U25 U27 U29 U31 = stm32wb5mmg; PROD_ID: IC-17415
U2 U4 U6 U8 U10 U12 U14 U16 U18 U20 U22 U24 U26 U28 U30 U32 = SparkFun-IC-Memory; PROD_ID: IC-15107
U$4 U$5 U$7 U$11 U$12 U$14 U$18 U$19 U$21 U$25 U$26 U$28 U$32 U$33 U$35 U$39 U$40 U$42 U$46 U$47 U$49 U$53 U$54 U$56 U$60 U$61 U$63 U$67 U$68 U$70 U$74 U$75 U$77 U$81 U$82 U$84 U$88 U$89 U$91 U$95 U$96 U$98 U$102 U$103 U$105 U$109 U$110 U$112 = output